# EAGLE board phonenet-de9 (EAGLE 6.5.0)
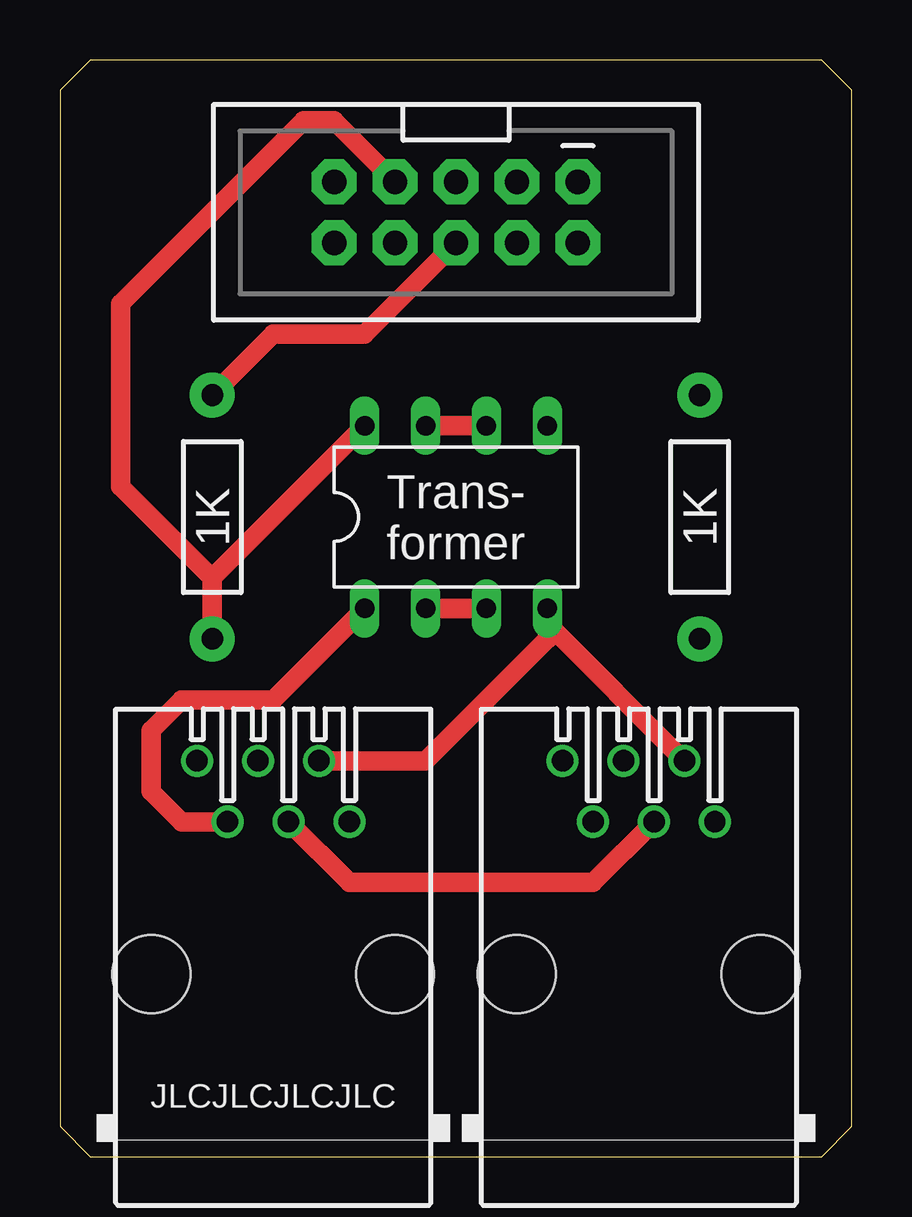
[diagram p0: board, top side]
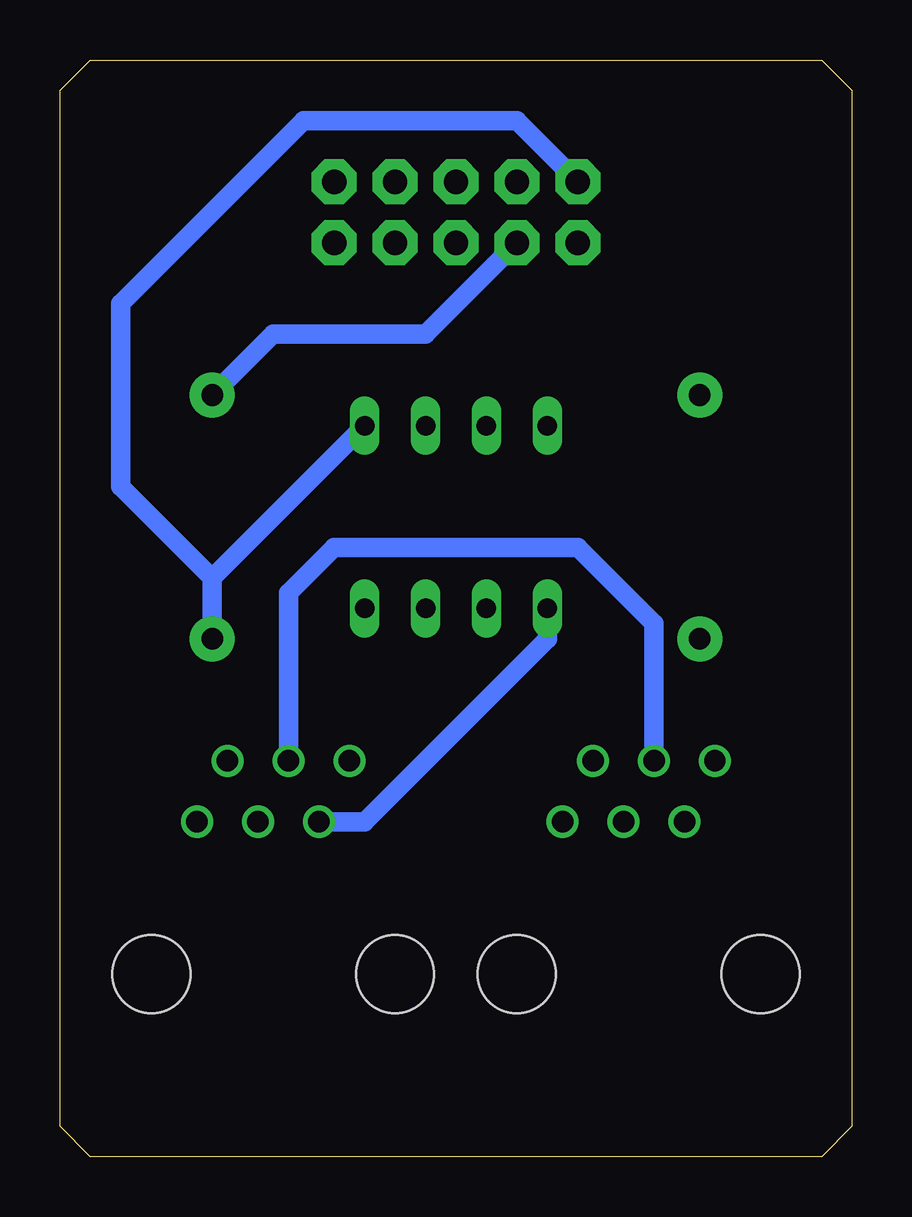
[diagram p1: board, bottom side, seen from below]

Size 33.02 x 45.72 mm. Coordinates in mm from the lower left corner, seen from the top.
Outline: 0,1.27 1.27,0 31.75,0 33.02,1.27 33.02,44.45 31.75,45.72 1.27,45.72 0,44.45 0,1.27
Copper layers (1*16): Top 0.0356mm / dielectric 1.5011mm / Bottom 0.0356mm
Design rules "LaenPCBOrder": minimum track width 6mil, minimum drill 13mil, track to track 6mil, track to pad 6mil, pad to pad 6mil, via to via 6mil, smd to smd 6mil, copper to edge 15mil, drill to drill 6mil, minimum pad ring 7mil, minimum via ring 7mil, stop-mask expansion 3mil, vias tented up to drill 0mil, thermal gap 10mil

## Footprints (pad centres in the part's own frame; a part is rotated, then mirrored left to right if it is on the bottom)
520250-3 = drill 0.889: 1 -3.175,8.89; 2 -1.905,6.35; 3 -0.635,8.89; 4 0.635,6.35; 5 1.905,8.89; 6 3.175,6.35 | hole 3.251: -5.08,0; 5.08,0
AXIAL-0.4 = drill 0.9 pad 1.88: P$1 -5.08,0; P$2 5.08,0
2X5-SHROUDED = drill 1.016 pad 1.88 octagon: 1 -1.27,5.08; 2 1.27,5.08; 3 -1.27,2.54; 4 1.27,2.54; 5 -1.27,0; 6 1.27,0; 7 -1.27,-2.54; 8 1.27,-2.54; 9 -1.27,-5.08; 10 1.27,-5.08
DIL08 = drill 0.813 long: 1 -3.81,-3.81; 2 -1.27,-3.81; 3 1.27,-3.81; 4 3.81,-3.81; 5 3.81,3.81; 6 1.27,3.81; 7 -1.27,3.81; 8 -3.81,3.81

## Placement (x,y rotation side)
E$1  [520250-3]  8.89,7.62 0 top
E$2  [520250-3]  24.13,7.62 0 top
E$3  [AXIAL-0.4]  6.35,26.67 90 top
E$4  [AXIAL-0.4]  26.67,26.67 90 top
E$5  [2X5-SHROUDED]  16.51,39.37 270 top
E$20  [DIL08]  16.51,26.67 0 top

## Library data of the parts
E$1 E$2 = con-amp
E$3 E$4 = SparkFun-Passives
E$5 = SparkFun-Connectors
E$20 = ic-package

## Nets
S$1: E$1.5 E$2.5 E$20.4
S$2: E$1.3 E$2.3
S$3: E$1.2 E$2.2 E$20.1
S$4: E$1.4 E$2.4
S$5: E$20.6 E$20.7
S$6: E$4.P$1 E$5.9 E$20.5
S$7: E$3.P$1 E$5.7 E$20.8
S$8: E$4.P$2 E$5.8
S$9: E$3.P$2 E$5.6
S$15: E$20.2 E$20.3

## Tracks (layer width: path | path; a pad name or v marks a point on that pad's centre or on a via)
S$1
  Top 0.813: E$1.5 15.24,16.51 20.32,21.59 E$20.4 20.32,22.23 E$2.5
S$2
  Bottom 0.813: E$1.3 8.26,22.23 11.43,25.4 21.59,25.4 23.5,23.5 E$2.3
S$3
  Top 0.813: E$1.2 5.08,13.97 3.81,15.24 3.81,17.78 5.08,19.05 8.89,19.05 E$20.1
  Bottom 0.813: E$20.1 12.7,21.59 20.32,13.97 E$2.2
S$4
  Top 0.813: E$2.4 22.23,11.43 12.06,11.43 E$1.4
S$5
  Top 0.813: E$20.7 E$20.6
S$6
  Bottom 0.813: E$5.9 13.97,43.18 22.86,43.18 30.48,35.56 30.48,27.94 26.67,24.13 | E$20.5 26.67,24.13 | 26.67,24.13 E$4.P$1
S$7
  Top 0.813: E$20.8 6.35,24.13 | 6.35,24.13 E$3.P$1 | E$5.7 11.43,43.18 10.16,43.18 2.54,35.56 2.54,27.94 6.35,24.13
S$8
  Bottom 0.813: E$4.P$2 24.13,34.29 17.78,34.29 E$5.8
S$9
  Top 0.813: E$3.P$2 8.89,34.29 12.7,34.29 E$5.6
S$15
  Top 0.813: E$20.3 E$20.2

## Text on the board
tNames: 1K | Trans- / former | 1K | JLCJLCJLCJLC